# Altium PCB Candunio.PcbDoc (part 2 of 2)
Units mm, origin at the board's own origin, x right, y up, seen from the top; angles counter-clockwise.
Board outline 46 x 46 mm, 2 copper layers (Top Layer, Bottom Layer); 43 components, 53 nets, 183 pads, 239 vias.
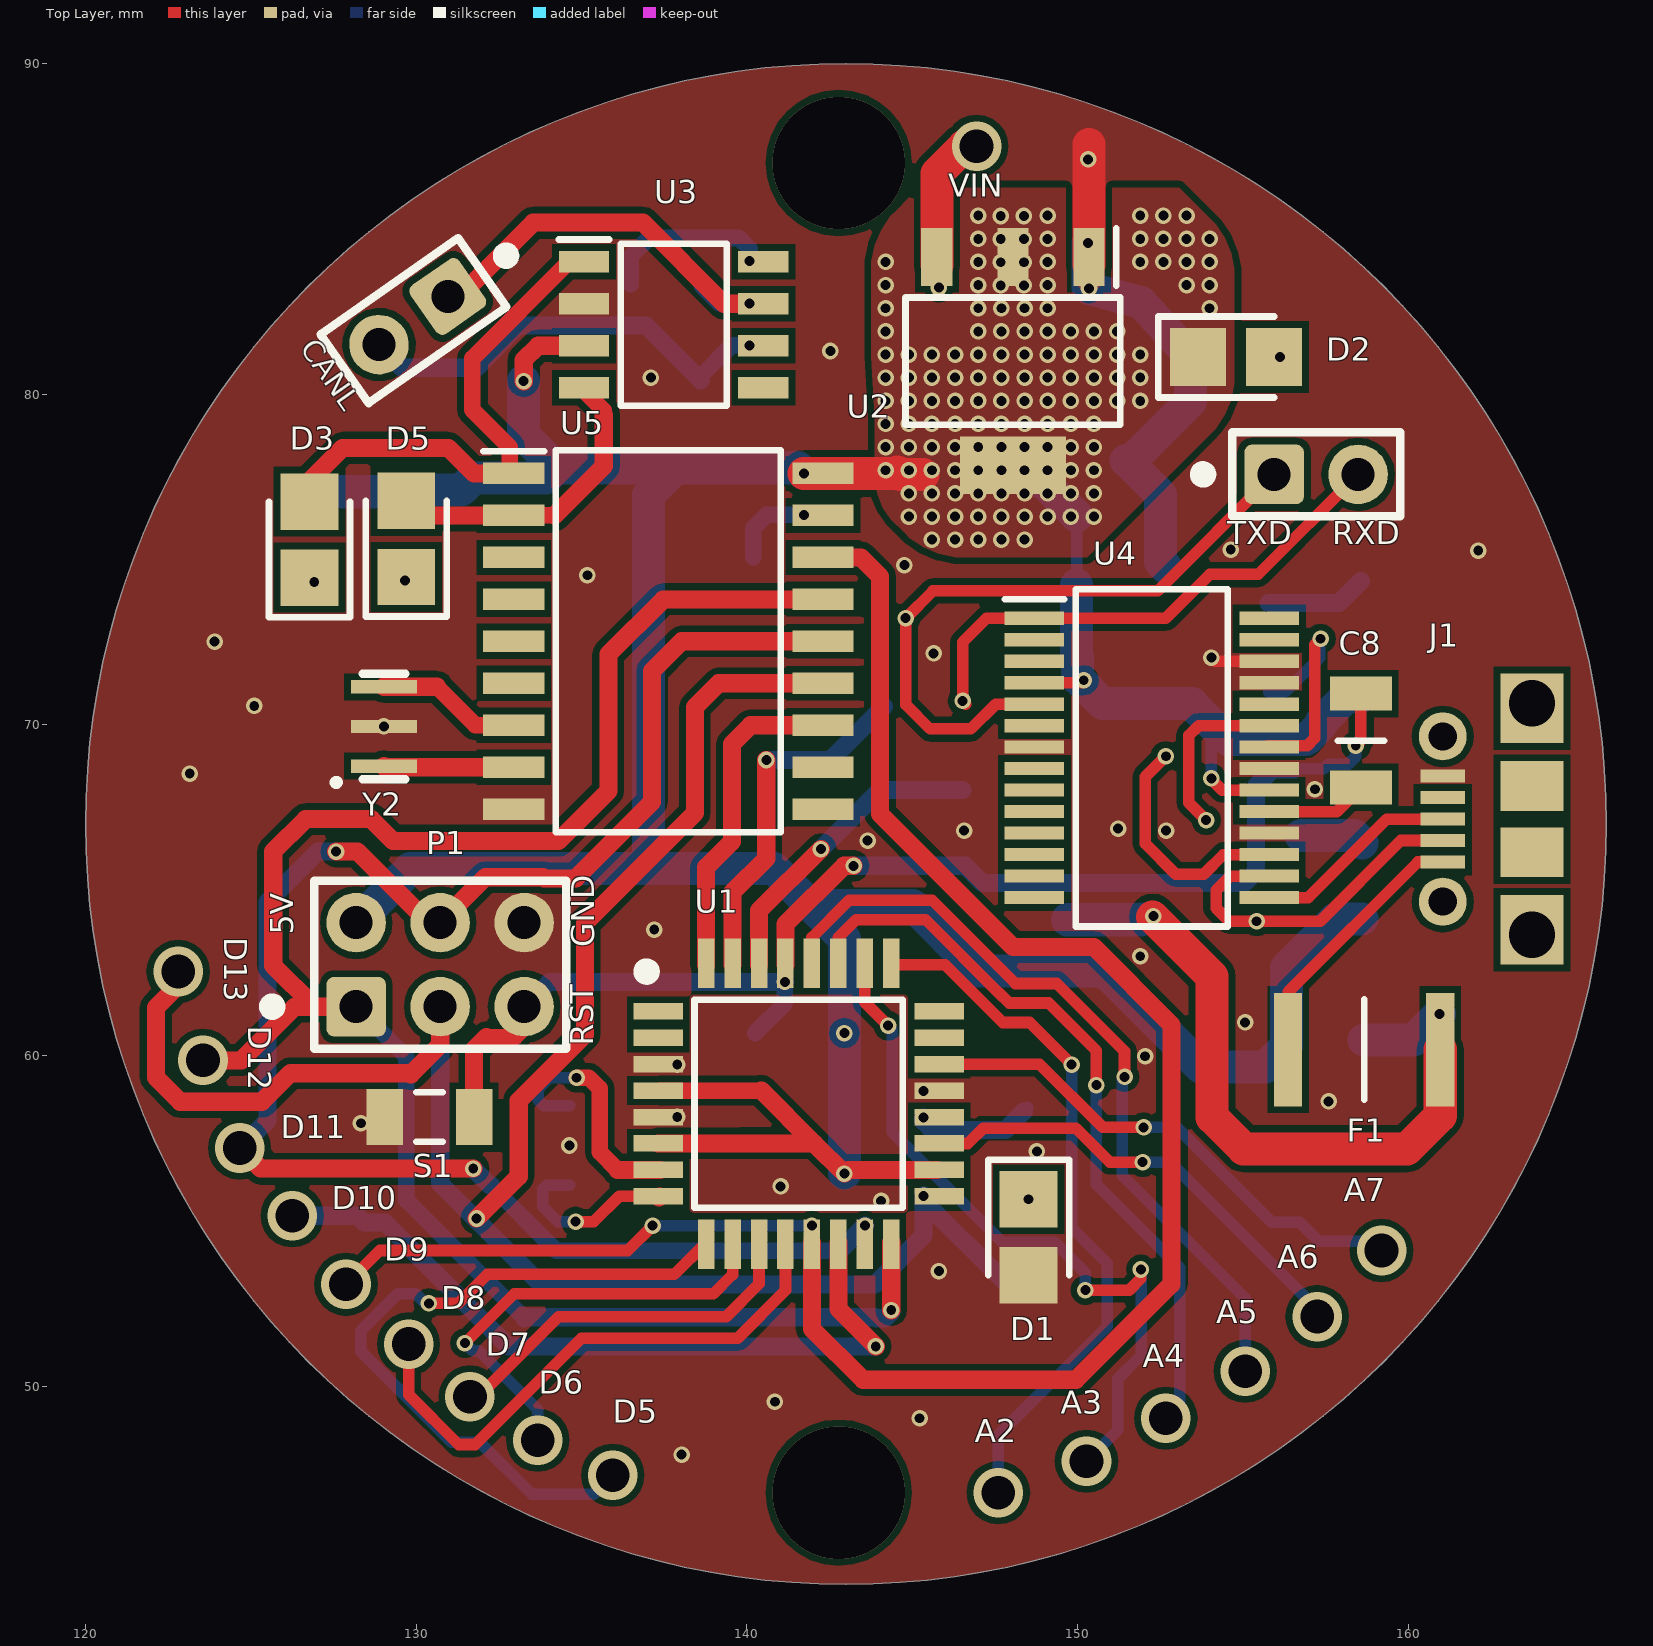
[diagram p0: Top Layer view]

## Via types
v1: diameter 0.5, hole 0.3, Top Layer to Bottom Layer, tented both sides, 221 vias
v2: diameter 1.5, hole 1.02, Top Layer to Bottom Layer, 16 vias
v3: diameter 4, hole 4, Top Layer to Bottom Layer, 2 vias

## Nets (pads, with @x,y where several pads share a name; then routed paths per layer and width w, separated by ;. In a path a pad name is that pad's centre, name@x,y a point inside that pad or via, vN(x,y) a via of type N, cw(c..) or ccw(c..) an arc to the next point about the centre after c; other vN are vias at no path point) (continued)
GND: (continued)
  other v1: 138.025,47.925 145.225,49.025 140.85,49.525 145.811,53.475 144.059,55.597 141.024,56.037 148.775,57.1 134.633,57.275 128.325,57.949 137.897,58.141 157.6,58.609 145.349,58.926 137.897,59.725 152.05,59.974 155.075,61 151.9,63 137.2,63.806 143.656,66.5 146.575,66.8 152.683,66.8 151.228,66.858 157.182,68.05 123.15,68.525 129.025,69.95 125.1,70.575 145.65,72.161 123.9,72.517 135.175,74.525 144.766,74.832 162.125,75.271 154.638,75.3 137.1,80.5 142.526,81.307 150.325,87.1
NetC3_1: C3.1 U1.20 | length 3.7
  Bottom Layer w0.35: C3.1@148.375,58.3 C3.1@148.5,58.425
  Bottom Layer w0.55: v1(145.339,58.125) 145.339,58.011 145.604,57.746 147.821,57.746 C3.1@148.375,58.3
NetC8_2: C8.2 U4.19 | length 3.2
  Top Layer w0.35: U4.19@155.7,67.375 157.847,67.375 C8.2
NetD1_1: D1.1 R4.1
  other v1: 148.525,55.65
NetD2_2: D2.2 R5.1
  other v1: 156.125,81.125
NetD3_1: D3.1 R7.2
  other v1: 126.917,74.32
NetD3_2: D3.2 U3.1 U5.1 | length 16
  Top Layer w0.35: D3.2 D3.2@126.773,77.373
  Top Layer w0.5: U5.1@132.825,77.605 132.825,78.4 131.701,79.524 131.701,81.084 134.621,84.005 U3.1@134.987,84.005
  Top Layer w0.55: D3.2@126.773,77.373 127.775,78.375 130.975,78.375 131.745,77.605 U5.1
NetD5_1: D5.1 R10.1
  other v1: 129.667,74.371
NetD5_2: D5.2 U3.4 U5.2 | length 9.4
  Top Layer w0.5: U5.2 134.185,76.335 ; U3.4@134.987,80.195 135.675,79.507 135.675,79.374
  Top Layer w0.55: D5.2 130.138,76.335 U5.2 ; 134.185,76.335 135.675,77.825 135.675,79.374
NetD6_2: D6.2 R11.2 | length 2.1
  Bottom Layer w0.55: R11.2@156.595,66.624 156.62,66.65 R11.2
  Bottom Layer w1: R11.2 158.381,66.65 D6.2@158.605,66.425
NetD7_2: D7.2 R12.2 | length 3.1
  Bottom Layer w0.55: R12.2@155.787,73.683 157.908,73.683 D7.2@158.575,74.35
NetF1_2: F1.2 J1.1 | length 8.1
  Top Layer w0.35: F1.2 156.375,61.925 160.3,65.85 J1.1
NetR6_2: R6.2 U3.8 | length 5.2
  Bottom Layer w0.5: R6.2@136.487,83.325 136.487,84.175 137.037,84.725 139.762,84.725 140.087,84.4 v1(140.087,84.025)
NetR9_1: R9.1 U5.17 | length 2.6
  Bottom Layer w0.5: R9.1@140.2,75.075 140.2,75.95 140.6,76.35 v1(141.725,76.35)
NetR11_1: R11.1 U4.23 | length 5.2
  Top Layer w0.35: v1(153.895,67.117) 153.372,67.641 153.372,69.679 153.668,69.975 U4.23@155.7,69.975
NetR12_1: R12.1 U4.22 | length 7.2
  Top Layer w0.35: U4.22@155.7,69.325 155.746,69.371 156.95,69.371 157.179,69.6 157.179,72.425 v1(157.358,72.604)
  Bottom Layer w0.35: R12.1@155.787,70.983 156.277,70.983 157.325,72.032 157.325,72.571 v1(157.358,72.604)
NetU1_7: U1.7 Y1.1 | length 7.5
  Top Layer w0.5: v1(134.85,59.325) 135.225,59.325 135.55,59 135.55,57.075 136.088,56.537
  Top Layer w0.55: 136.088,56.537 U1.7 U1.7@137.369,56.537
  Bottom Layer w0.35: Y1.1 133.86,58.476 133.687,58.649 133.687,58.988 134.024,59.325 v1(134.85,59.325)
NetU1_8: U1.8 Y1.3 | length 5.4
  Top Layer w0.35: v1(134.819,54.975) 135.375,54.975 136.137,55.737 U1.8
  Top Layer w0.55: U1.8@137.344,55.712 U1.8@137.369,55.737
  Bottom Layer w0.35: Y1.3 133.951,56.076 133.83,55.955 133.83,55.429 134.283,54.975 v1(134.819,54.975)
NetU5_7: U5.7 Y2.3 | length 4.3
  Top Layer w0.5: 130.625,71.15 131.79,69.985 U5.7@132.825,69.985
  Top Layer w0.55: Y2.3 130.625,71.15
NetU5_8: U5.8 Y2.1 | length 3.8
  Top Layer w0.55: Y2.1 129.06,68.715 U5.8@132.825,68.715
RESET: C8.1 P1.3 R1.2 S1.1 U1.29 | length 39.1
  Top Layer w0.35: v1(158.42,69.367) 158.575,69.523 C8.1
  Top Layer w0.5: 132.131,60.554 132.979,60.554 P1.3@133.265,60.84
  Top Layer w0.55: S1.1 131.75,60.173 132.131,60.554 ; P1.3@133.265,60.84 P1.3 ; U1.29@141.169,62.737 141.169,63.969 142.935,65.735 v1(143.231,65.735)
  Bottom Layer w0.35: 155.799,68.549 156.574,68.549 156.7,68.675 157.453,68.675 157.583,68.804 158.187,68.804 158.42,69.037 v1(158.42,69.367)
  Bottom Layer w0.5: P1.3 134.015,62.225 ; R1.2@140.25,60.675 141.15,61.575 v1(141.15,62.225)
  Bottom Layer w0.55: 134.015,62.225 v1(141.15,62.225) ; v1(143.231,65.735) 146.609,65.735 147.129,65.215 155.055,65.215 155.397,65.557 155.397,68.147 155.799,68.549
RXD: "TXD    RXD.2" R2.2 U4.1 | length 16
  Top Layer w0.35: v1@146.625,70.625 v1(146.525,70.725) 146.525,72.5 147.25,73.225 148.8,73.225 152.675,73.225 153.999,74.549 155.464,74.549 158.49,77.575
TXD: "TXD    RXD.1" R3.2 U4.5 | length 20.2
  Top Layer w0.35: U4.5@148.8,70.625 147.525,70.625 146.775,69.875 145.542,69.875 144.805,70.612 v1(144.805,73.225) 145.63,74.05 152.425,74.05 155.95,77.575
USBD+: J1.3 U4.15 | length 6.3
  Top Layer w0.35: U4.15@155.7,64.775 156.984,64.775 159.359,67.15 J1.3
USBD-: J1.2 U4.16 | length 10.3
  Top Layer w0.35: U4.16@155.7,65.425 154.621,65.425 154.194,64.999 154.194,64.449 154.584,64.059 v1(155.423,64.059) 157.343,64.059 159.784,66.5 J1.2
VUSB: C9.1 C10.1 D4.1 F1.1 | length 21.4
  Top Layer w1: v1@152.273,64.186 154.075,62.384 154.075,58.125 155.025,57.175 159.975,57.175 160.975,58.175 F1.1
  Bottom Layer w1: C10.1@149.696,64.105 151.908,64.105 C9.1@151.931,64.127 ; D4.1 160.163,60.463 v1(160.95,61.25)
  other v1: 152.298,64.211
pads on no net: J1.0 J1.4 U3.5 U4.2 U4.3 U4.6 U4.8 U4.9 U4.10 U4.11 U4.12 U4.13 U4.14 U4.24 U4.27 U4.28 U5.3 U5.4 U5.5 U5.6 U5.10 U5.11
copper on no net:
  other v3: 142.779,46.775 142.779,86.994

## Polygon pours and split planes (outlines as drawn)
GND on Top Layer "Top Layer-GND" (solid, pour order 15): 120,67 cw(c143,67) 143,90 cw(c143,67) 166,67 cw(c143,67) 143,44 cw(c143,67) 120,67
+5V on Top Layer "Top Layer-RegHeat" (solid, pour order 12): 143.77,81.15 143.77,83.76 cw(c146.31,83.76) 144.514,85.556 144.957,86 cw(c145.561,85.396) 145.561,86.25 153.075,86.25 154.006,85.319 cw(c152.21,83.523) 154.75,83.523 154.75,80.577 cw(c152.21,80.577) 154.006,78.781 150.3,75.075 146.552,75.075 cw(c146.552,77.615) 144.756,75.819 144.5,76.075 cw(c146.009,77.584) 143.875,77.584 143.875,79.3
GND on Bottom Layer "Bottom Layer-GND" (solid, pour order 14): 120,67 cw(c143,67) 143,90 cw(c143,67) 166,67 cw(c143,67) 143,44 cw(c143,67) 120,67
+5V on Bottom Layer "Bot Layer-RegHeat" (solid, pour order 13): 143.77,81.15 143.77,83.76 cw(c146.31,83.76) 144.514,85.556 144.957,86 cw(c145.561,85.396) 145.561,86.25 153.075,86.25 154.006,85.319 cw(c152.21,83.523) 154.75,83.523 154.75,80.577 cw(c152.21,80.577) 154.006,78.781 150.3,75.075 146.552,75.075 cw(c146.552,77.615) 144.756,75.819 144.5,76.075 cw(c146.009,77.584) 143.875,77.584 143.875,79.3

## Silkscreen, mask and mechanical layers (free items; w line width, h text height)
Top Overlay:
  text "VIN" at 146.1,85.725 h1.2
  text "5V" at 126.525,63.65 h1.2 r90
  text "D13" at 123.95,63.575 h1.2 r270
  text "GND" at 135.625,63.275 h1.2 r90
  text "D12" at 124.675,60.9 h1.2 r270
  text "RST" at 135.597,60.3 h1.2 r90
  text "D11" at 125.9,57.25 h1.2
  text "A7" at 158.05,55.35 h1.2
  text "D10" at 127.45,55.11 h1.2
  text "D9" at 129.026,53.554 h1.2
  text "A6" at 156.05,53.325 h1.2
  text "D8" at 130.75,52.075 h1.2
  text "A5" at 154.2,51.65 h1.2
  text "D7" at 132.1,50.675 h1.2
  text "A4" at 151.975,50.325 h1.2
  text "D6" at 133.7,49.525 h1.2
  text "A3" at 149.5,48.925 h1.2
  text "D5" at 135.947,48.65 h1.2
  text "A2" at 146.9,48.05 h1.2
Bottom Overlay:
  drawing of 3058 lines, arcs and shapes, not listed
  text "Canduino V1 / UVIC Hybrid / Akshdeep M" at 132.653,66.1 h2
Mechanical 1:
  circle w0.1: c142.96,66.992 r23